# Altium PCB PCB_Button.PcbDoc
Units mil, origin at the board's own origin, x right, y up, seen from the top; angles counter-clockwise.
Board outline 820 x 2400 mil, 2 copper layers (Top Layer, Bottom Layer); 28 components, 18 nets, 80 pads, 20 vias.
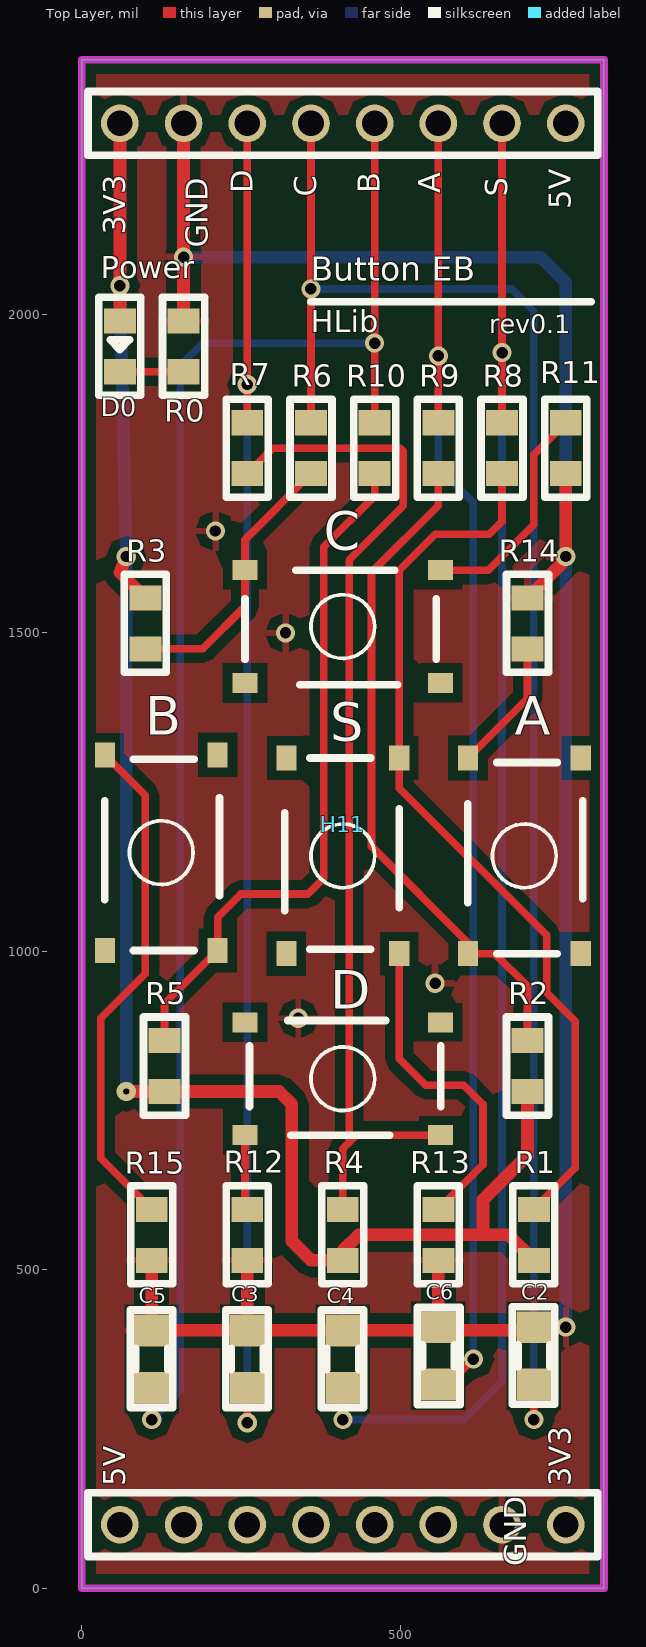
[diagram p0: Top Layer view]
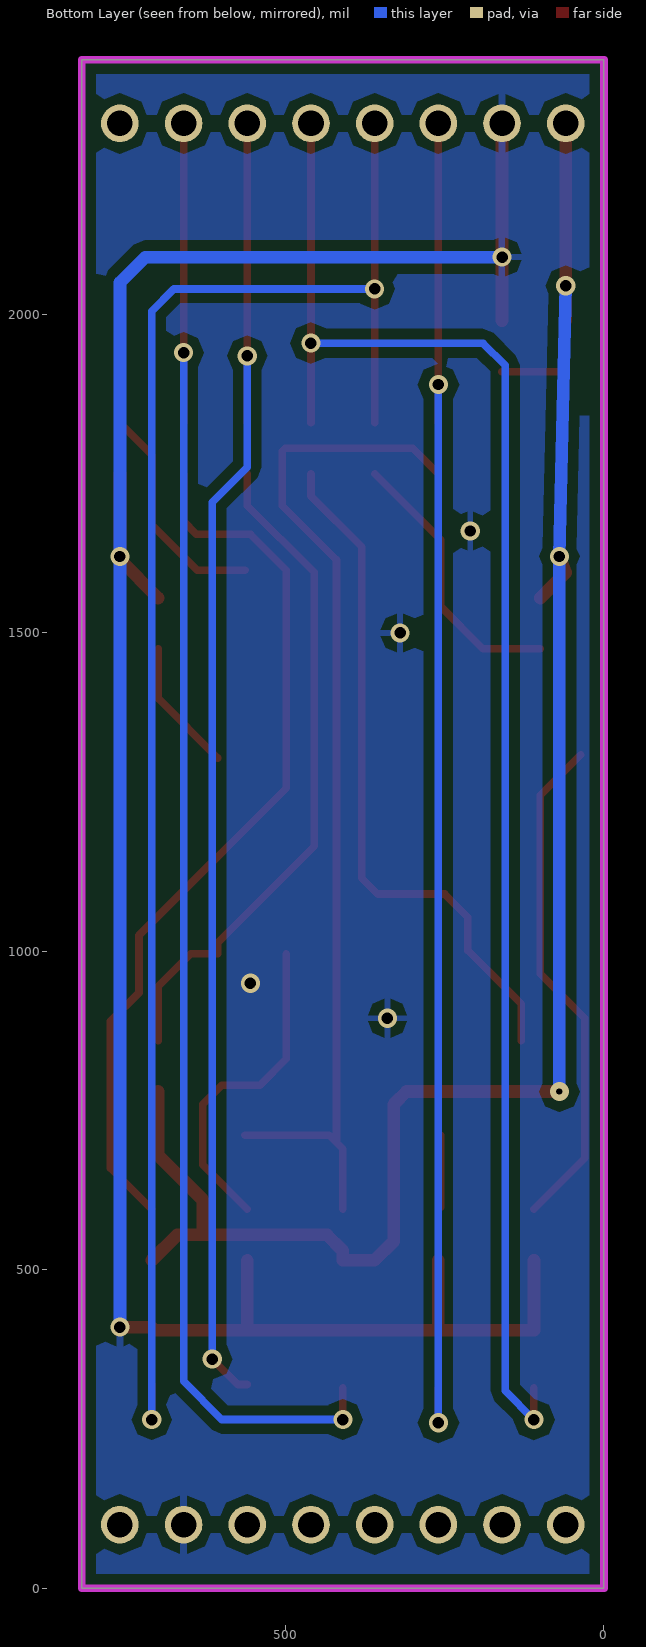
[diagram p1: Bottom Layer view, seen from below]
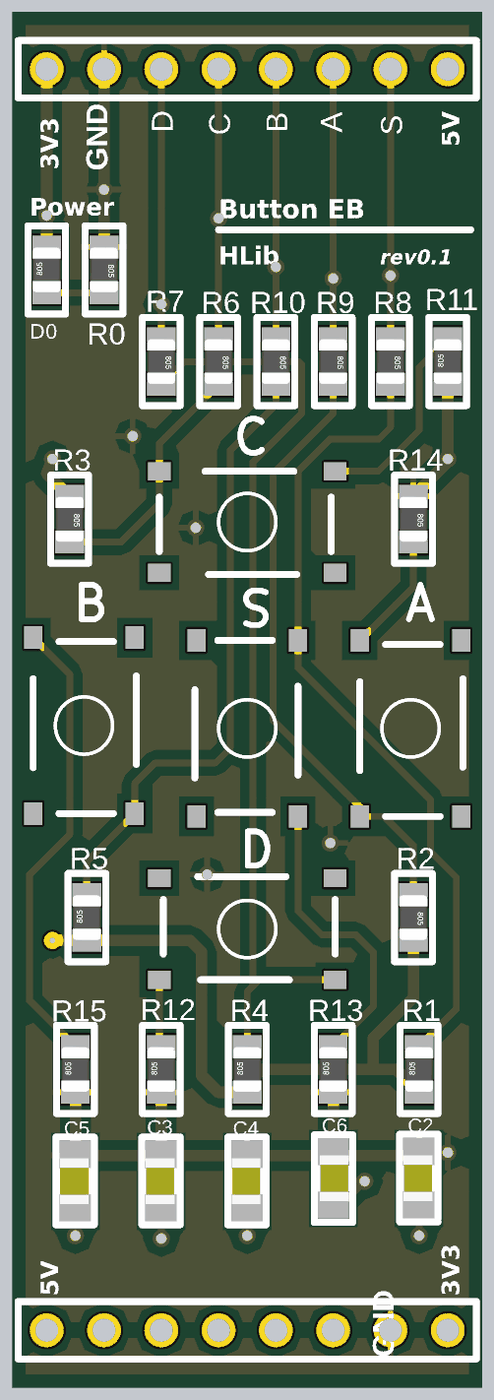
[diagram p2: 3D render of the assembled board from above, using the file's embedded part models]

## Layer stack, top to bottom
Top Layer: signal copper 1.4
Dielectric: dielectric 12.6, FR-4, Dk 4.8
Bottom Layer: signal copper 1.4

## Board outline
0,0 0,2400 820,2400 820,0

## Design rules (kind name [scope] priority, off if disabled: settings)
Clearance [InPolygon] p1: gap=10
Clearance Clearance_1 [All] p2: gap=10
PolygonConnect [All] p1: connectstyle=Relief reliefconductorwidth=10 reliefentries=4 polygonreliefangle="90 Angle"
RoutingVias [All] p1: holewidth=25 width=40 viastyle="Through Hole" minholewidth=28 minwidth=50 maxholewidth=28 maxwidth=50
SilkscreenOverComponentPads SilkToSolderMaskClearance [IsPad] p1: minsilkscreentomaskgap=10
SolderMaskExpansion [All] p1: expansion=4
Width [All] p1: maxlimit=20 minlimit=12 preferedwidth=12
27 further rules are at their usual default settings.

## Components (designator, comment, footprint, x,y, rotation, side; value= is the part's Value field where it differs from the comment)
A "SW-4P-S" SW4 695,1150 r90 top
B "SW-4P-S" SW4 125,1155 r90 top
C "SW-4P-S" SW4 410,1510 r0 top
C2 "104" SM-0805 710,365 r270 top
C3 "104" SM-0805 260,360 r270 top
C4 "104" SM-0805 410,360 r270 top
C5 "104" SM-0805 110,360 r270 top
C6 "104" SM-0805 560,365 r90 top
D "SW-4P-S" SW4 410,800 r180 top
D0 "LED3" SMD0805LED 60,1950 r270 top
H11 "MBoard1_BH_DualPorts" MBoard1_BH_DualPorts 60,2300 r0 top
R0 "R" SMD0805R 160,1950 r90 top
R1 "R" SMD0805R 710,555 r270 top
R2 "R" SMD0805R 700,820 r90 top
R3 "R" SMD0805R 100,1515 r90 top
R4 "R" SMD0805R 410,555 r270 top
R5 "R" SMD0805R 130,820 r270 top
R6 "R" SMD0805R 360,1790 r90 top
R7 "R" SMD0805R 260,1790 r90 top
R8 "R" SMD0805R 660,1790 r90 top
R9 "R" SMD0805R 560,1790 r90 top
R10 "R" SMD0805R 460,1790 r90 top
R11 "R" SMD0805R 760,1790 r270 top
R12 "R" SMD0805R 260,555 r270 top
R13 "R" SMD0805R 560,555 r270 top
R14 "R" SMD0805R 700,1515 r90 top
R15 "R" SMD0805R 110,555 r270 top
S "SW-4P-S" SW4 410,1150 r270 top

## Footprints (in the part's own frame and the unit in brackets; to place one, negate y for a bottom-side part, rotate by r counter-clockwise, add the part's x,y. Pads: shape width x height; smd on the part's side, far side on the other; paste and mask are expansions set on the pad)
MBoard1_BH_DualPorts [mm]
  round 1.5 hole 1.02: 1(0,0) 2(2.54,0) 3(5.08,0) 4(7.62,0) 5(10.16,0) 6(12.7,0) 7(15.24,0) 8(17.78,0) 9(17.78,-55.88) 10(15.24,-55.88) 11(12.7,-55.88) 12(10.16,-55.88) 13(7.62,-55.88) 14(5.08,-55.88) 15(2.54,-55.88) 16(0,-55.88)
  silkscreen extent -1.27,-57.15 19.05,1.27, body extent -1.27,-57.15 19.05,1.27, height 8
SM-0805 [mil] "Compoment SMD 80x50mil"
  rect 50x55 smd: 1(-45,0) 2(45,0)
  silkscreen extent -77,-34 76,33, body extent -40,-27 40,23, height 24
SMD0805LED [mil] "Chip LED, Body 2.0 x 1.3 mm (LxW typ)"
  rect 39.37x50 smd: 1(-40,0) 2(40,0)
  silkscreen extent -77,-33 77,33, body extent -39,-25 39,25, height 31
SMD0805R [mil] "Chip Resistor; Body 2.0 x 1.3 mm (LxW typ)"
  rect 39.37x50 smd: 1(-40,0) 2(40,0)
  silkscreen extent -77,-33 77,33, body extent -39,-25 39,25, height 31
SW4 [mm] "SW button 4pin, 6x6x3mm"
  rect 1x0.8 smd: 1(-3.9,2.25) 2(3.9,2.25) 3(3.9,-2.25) 4(-3.9,-2.25)
  silkscreen extent -3.9,-2.32 3.72,2.25

## Part data
A B C D S: library part SW-4PIN-SMALL, "Switch Small 4 Pin"
C2 C3 C4 C5 C6: library part CM, "Cap SMD"
D0: library part LEDSMD, "LED SMD"
R0 R1 R2 R3 R4 R5 R6 R7 R8 R9 R10 R11 R12 R13 R14 R15: "RES_08"

## Via types
v1: diameter 30, hole 18, Top Layer to Bottom Layer, tented both sides, 19 vias
v2: diameter 30, hole 10, Top Layer to Bottom Layer, 1 vias

## Nets (pads, with @x,y where several pads share a name; then routed paths per layer and width w, separated by ;. In a path a pad name is that pad's centre, name@x,y a point inside that pad or via, vN(x,y) a via of type N, cw(c..) or ccw(c..) an arc to the next point about the centre after c; other vN are vias at no path point)
3V3: D0.1 H11.1 R1.2 R2.1 R3.2 R4.2 R5.2 | length 2830.2
  Top Layer w20: D0.1 v1(60,2045) H11.1 ; v2(70,780) R5.2 310,780 330,760 330,545 360,515 R4.2 410,530 435,555 630,555 ; v1(70,1620) 60,1595 R3.2 ; R2.1 700,680 630,610 630,555 ; R1.2 670,555 630,555
  Bottom Layer w20: v1(60,2045) v1(70,1620) v2(70,780)
GND: C2.1 C3.1 C4.1 C5.1 C6.2 H11.2 H11.10 R0.2 R11.2 R12.2 R13.2 R14.2 R15.2 | length 3756.4
  Top Layer w20: R15.2 C5.1 C3.1 ; R0.2 v1(160,2090) H11.2 ; R12.2 C3.1 ; C6.2 R13.2 ; R14.2 760,1615 v1(760,1620) R11.2 ; C2.1@705,405 C4.1 C3.1 ; C2.1 v1(760,410)
  Bottom Layer w20: v1(160,2090) 720,2090 760,2050 v1(760,1620) v1(760,410)
  other v1: 340,895 555,950 320,1500 210,1660
NetA_1: A.1 R2.2 R9.1 | length 1059.7
  Top Layer w12: R9.1 560,1700 455,1595 455,1165 606.42,1013.58 A.1 648.54,996.46 700,945 R2.2
NetA_2: A.2 R14.1 | length 210.2
  Top Layer w12: A.2 700,1397.13 R14.1
NetB_2: B.2 R15.1 | length 802
  Top Layer w12: B.2 100,1244.96 100,965 30,895 30,675 R15.1
NetB_4: B.4 R5.1 R10.1 | length 1088.2
  Top Layer w12: R5.1 130,917.87 B.4 213.58,1053.58 250,1090 355,1090 380,1115 380,1635 460,1715 R10.1
NetC2_2: C2.2 H11.4 R6.2 | length 2629.5
  Top Layer w12: R6.2 H11.4 ; v1(710,265) C2.2
  Bottom Layer w12: v1(360,2040) 675,2040 710,2005 v1(710,265)
NetC3_2: C3.2 H11.3 R7.2 | length 2155
  Top Layer w12: v1(260,260) C3.2 ; R7.2 v1(260,1890) H11.3
  Bottom Layer w12: v1(260,260) v1(260,1890)
NetC4_2: C4.2 H11.7 R8.2 | length 2409.9
  Top Layer w12: v1(410,265) C4.2 ; R8.2 v1(660,1940) H11.7
  Bottom Layer w12: v1(410,265) 600,265 660,325 v1(660,1940)
NetC5_2: C5.2 H11.5 R10.2 | length 2513.1
  Top Layer w12: v1(110,265) C5.2 ; R10.2 v1(460,1955) H11.5
  Bottom Layer w12: v1(110,265) 155,310 155,1920 190,1955 v1(460,1955)
NetC6_1: C6.1 H11.6 R9.2 | length 2139.4
  Top Layer w12: C6.1 575,320 v1(615,360) ; R9.2 v1(560,1935) H11.6
  Bottom Layer w12: v1(560,1935) 560,1760 615,1705 v1(615,360)
NetC_1: C.1 R3.1 R6.1 | length 435.4
  Top Layer w12: R3.1 190,1475 256.46,1541.46 C.1 256.46,1646.46 R6.1
NetC_2: C.2 R11.1 | length 356.7
  Top Layer w12: C.2 638.58,1598.58 710,1670 710,1780 R11.1
NetD0_2: D0.2 R0.1 | length 100
  Top Layer w12: D0.2 R0.1
NetD_1: D.1 R4.1 R7.1 | length 1655.4
  Top Layer w12: R7.1 300,1790 500,1790 505,1785 505,1700 420,1615 420,700 410,690 ; R4.1 410,690 ; D.1 431.42,711.42 410,690
NetD_2: D.2 R12.1 | length 112.9
  Top Layer w12: R12.1@256.46,598.54 D.2
NetR1_1: R1.1 R8.1 S.1 | length 1413.1
  Top Layer w12: R8.1 660,1675 640,1655 555,1655 498.58,1598.58 S.1 498.58,1256.42 730,1025 730,935 775,890 775,660 R1.1
NetR13_1: R13.1 S.2 | length 520
  Top Layer w12: S.2 498.58,831.42 540,790 600,790 630,760 630,665 R13.1
pads on no net: A.3 A.4 B.1 B.3 C.3 C.4 D.3 D.4 H11.8 H11.9 H11.11 H11.12 H11.13 H11.14 H11.15 H11.16 S.3 S.4

## Polygon pours and split planes (outlines as drawn)
GND on Top Layer "Bottom Layer-No Net" (solid, remove dead copper, pour order 4): 0,2400 0,0 820,0 820,2400
GND on Bottom Layer "Bottom Layer-No Net" (solid, remove dead copper, pour order 6): 0,2400 0,0 820,0 820,2400

## Keep-outs
Keep-Out Layer:
  the board outline again, w12

## Silkscreen, mask and mechanical layers (free items; w line width, h text height)
Top Overlay:
  lines w12: 360,2020 800,2020
  text "D" at 280,2190 h60 r90
  text "B" at 480,2190 h60 r90
  text "A" at 575,2190 h60 r90
  text "C" at 380,2185 h60 r90
  text "S" at 680,2185 h60 r90
  text "5V" at 780,2165 h60 r90
  text "3V3" at 80,2125 h60 r90
  text "GND" at 210,2105 h60 r90
  text "Power" at 30,2045 h60
  text "Button EB" at 360,2040 h65
  text "HLib" at 360,1960 h60
  text "rev0.1" at 640,1960 h50
  text "5V" at 80,160 h60 r90
  text "3V3" at 780,160 h60 r90
  text "GND" at 710,35 h60 r90
Drill Drawing:
  text ".LEGEND" at 5060,-1300 h60
  text "Drill Drawing." at 5060,-1400 h60

## Dimensions
0,0 to 820,0 on Mechanical 1
0,0 to 0,2400 on Mechanical 1